# Altium PCB RP2350_DevBoard.PcbDoc (part 2 of 2)
Units mil, origin at the board's own origin, x right, y up, seen from the top; angles counter-clockwise.
Board outline 3000 x 3600 mil, 2 copper layers (Top Layer, Bottom Layer), stack 33.512 mil thick; 69 components, 85 nets, 318 pads, 96 vias.
Unrouted connection lines stored in the file: 43.
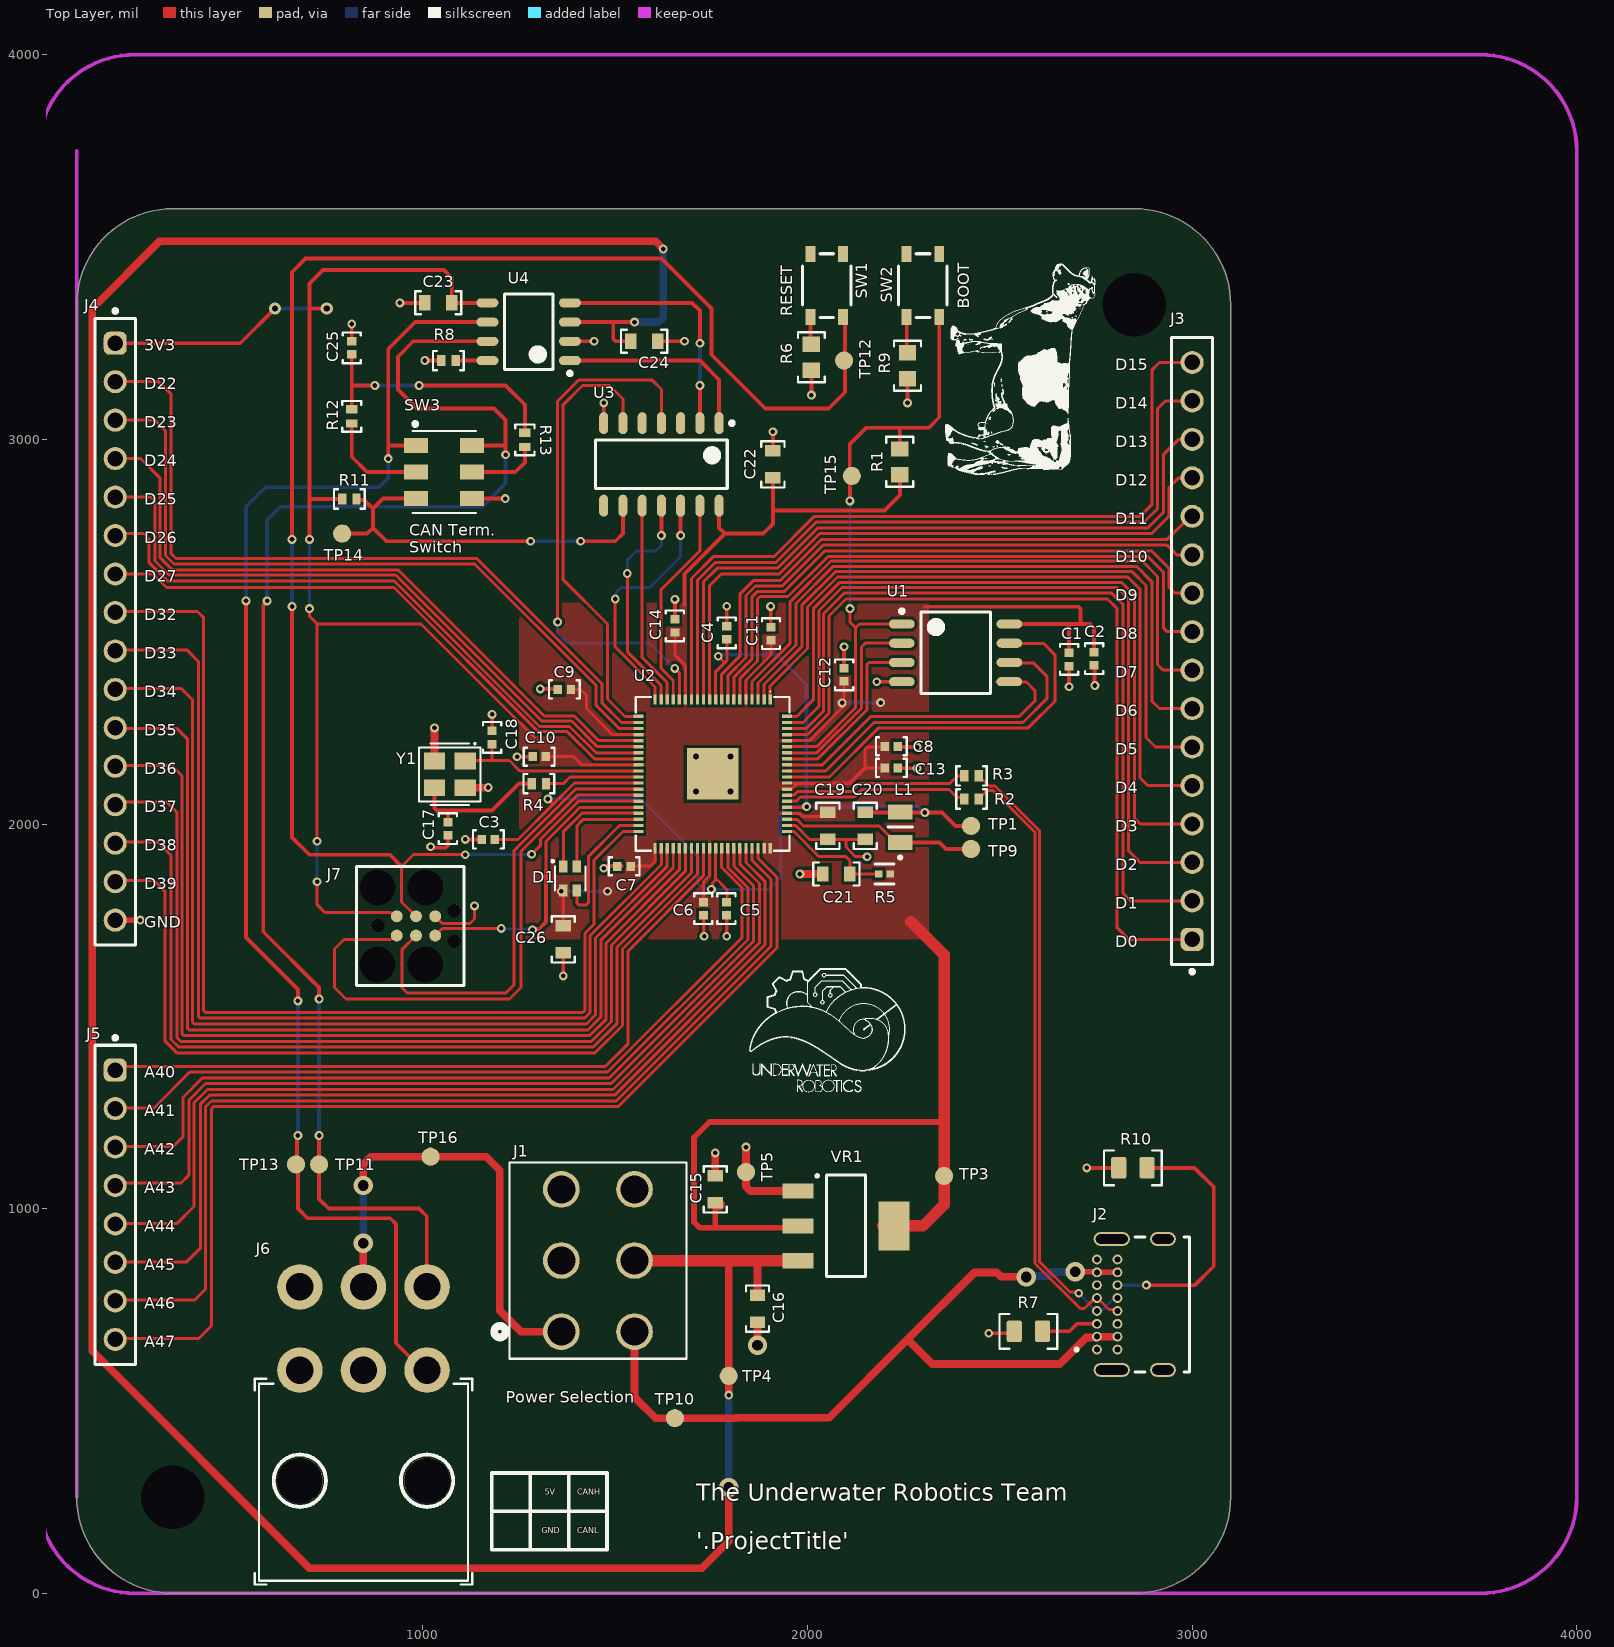
[diagram p0: Top Layer view]

## Silkscreen, mask and mechanical layers (free items; w line width, h text height) (continued)
Top Overlay: (continued)
  text "Power Selection" at 1215,495 h30
  text "5V" at 1316.5,255.5 h15
  text "CANH" at 1401.51,255.5 h15
  text "The Underwater Robotics Team" at 1710,240 h45
  text "GND" at 1309.01,155.5 h15
  text "CANL" at 1401.51,155.5 h15
  text "'.ProjectTitle'" at 1710,115 h45